# EAGLE board sensor board - pdf (EAGLE 7.4.0)
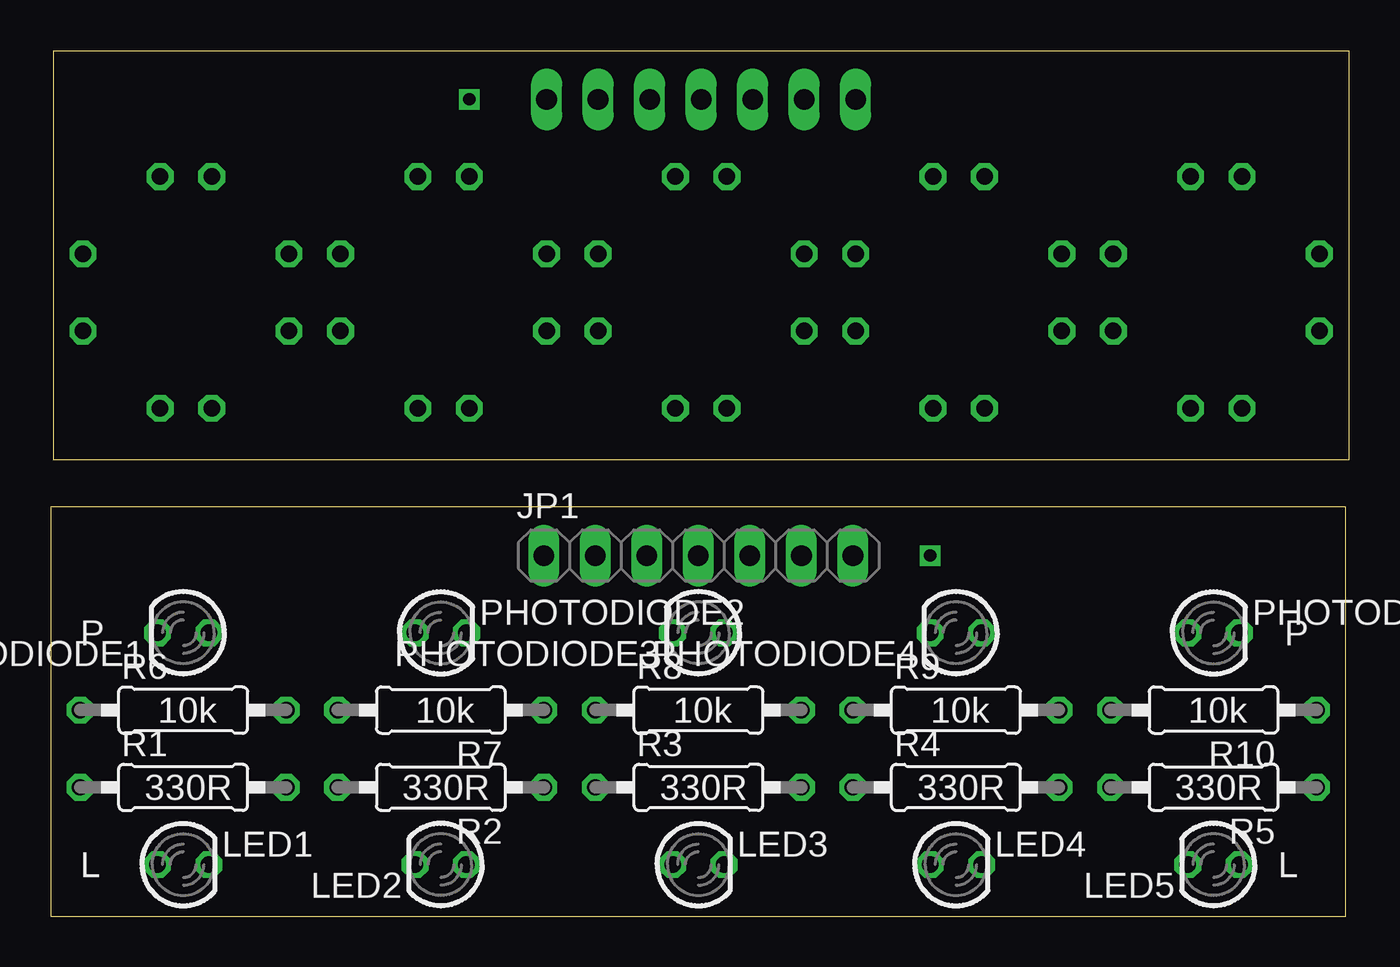
[diagram p0: board, top side]
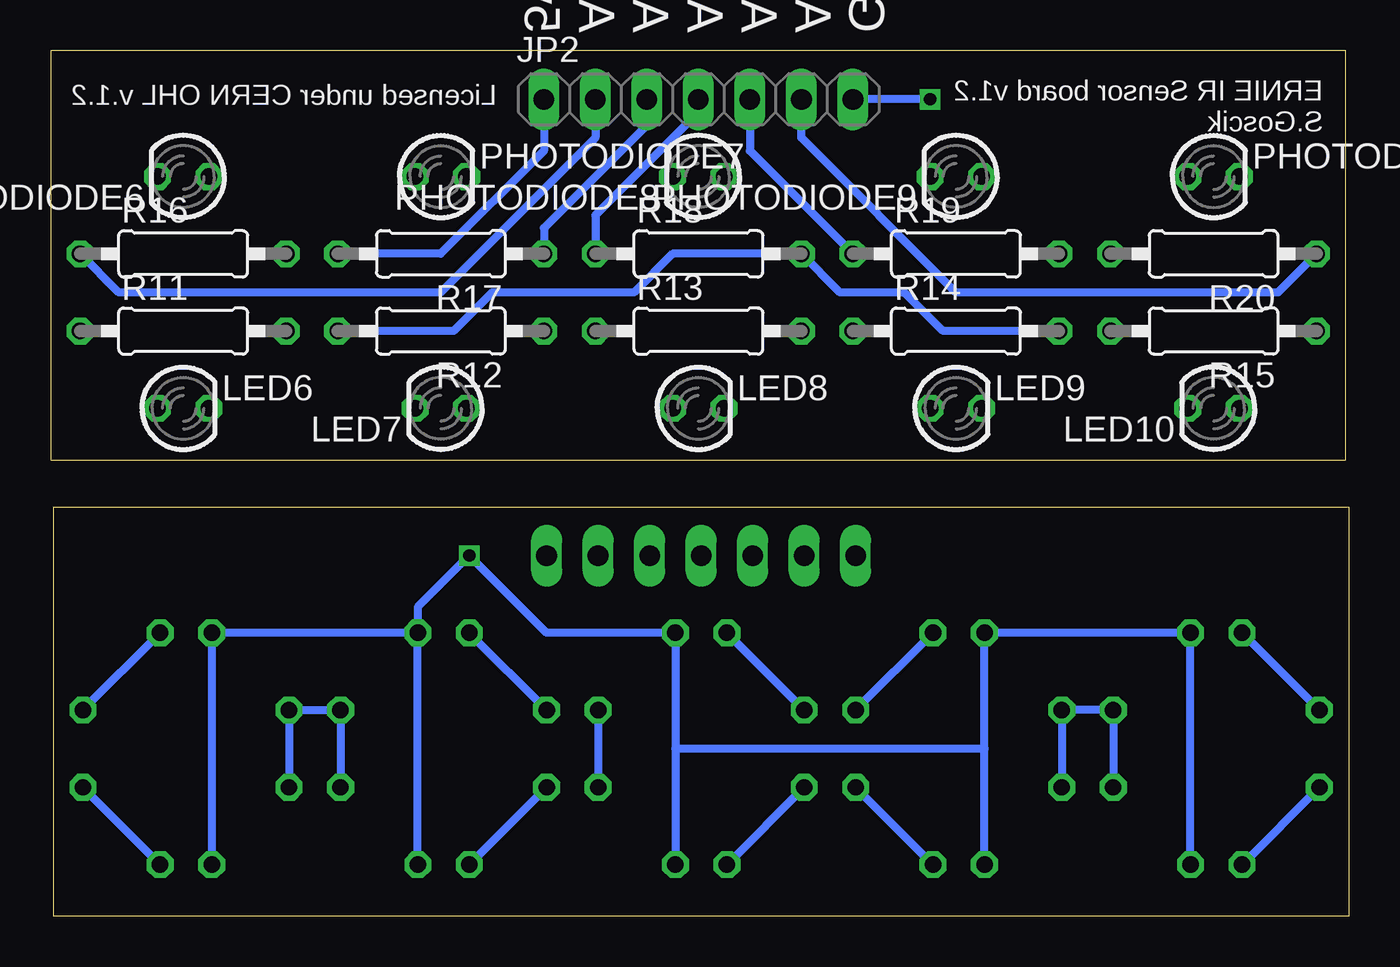
[diagram p1: board, bottom side, seen from below]

Size 64 x 42.67 mm. Coordinates in mm from the lower left corner, seen from the top.
Outline: 0,0 63.85,0 63.85,20.18 0,20.18 0,0
Outline: 64,22.5 0.15,22.5 0.15,42.67 64,42.67 64,22.5
Copper layers (1*16): Top 0.035mm / dielectric 1.5mm / Bottom 0.035mm
Design rules "default": minimum track width 10mil, minimum drill 24mil, track to track 8mil, track to pad 8mil, pad to pad 8mil, via to via 8mil, smd to smd 8mil, copper to edge 40mil, drill to drill 8mil, minimum pad ring 10mil, minimum via ring 8mil, stop-mask expansion 4mil, vias tented up to drill 0mil, thermal gap 10mil

## Footprints (pad centres in the part's own frame; a part is rotated, then mirrored left to right if it is on the bottom)
1X07 = drill 1.016 long: 1 -7.62,0; 2 -5.08,0; 3 -2.54,0; 4 0,0; 5 2.54,0; 6 5.08,0; 7 7.62,0
LED3MM = drill 0.813 octagon: A -1.27,0; K 1.27,0
0207/10 = drill 0.813 octagon: 1 -5.08,0; 2 5.08,0

## Placement (x,y rotation side)
JP1  [1X07]  31.93,17.78 0 top
JP2  [1X07]  32.07,40.28 0 bottom
LED1  [LED3MM]  6.53,2.54 0 top
LED2  [LED3MM]  19.23,2.54 180 top
LED3  [LED3MM]  31.93,2.54 0 top
LED4  [LED3MM]  44.63,2.54 0 top
LED5  [LED3MM]  57.33,2.54 180 top
LED6  [LED3MM]  57.47,25.04 0 bottom
LED7  [LED3MM]  44.77,25.04 180 bottom
LED8  [LED3MM]  32.07,25.04 0 bottom
LED9  [LED3MM]  19.37,25.04 0 bottom
LED10  [LED3MM]  6.67,25.04 180 bottom
PHOTODIODE1  [LED3MM]  6.53,13.97 180 top
PHOTODIODE2  [LED3MM]  19.23,13.97 0 top
PHOTODIODE3  [LED3MM]  31.93,13.97 180 top
PHOTODIODE4  [LED3MM]  44.63,13.97 180 top
PHOTODIODE5  [LED3MM]  57.33,13.97 0 top
PHOTODIODE6  [LED3MM]  57.47,36.47 180 bottom
PHOTODIODE7  [LED3MM]  44.77,36.47 0 bottom
PHOTODIODE8  [LED3MM]  32.07,36.47 180 bottom
PHOTODIODE9  [LED3MM]  19.37,36.47 180 bottom
PHOTODIODE10  [LED3MM]  6.67,36.47 0 bottom
R1  330R  [0207/10]  6.53,6.35 0 top
R2  330R  [0207/10]  19.23,6.35 180 top
R3  330R  [0207/10]  31.93,6.35 0 top
R4  330R  [0207/10]  44.63,6.35 0 top
R5  330R  [0207/10]  57.33,6.35 180 top
R6  10k  [0207/10]  6.53,10.16 0 top
R7  10k  [0207/10]  19.23,10.16 180 top
R8  10k  [0207/10]  31.93,10.16 0 top
R9  10k  [0207/10]  44.63,10.16 0 top
R10  10k  [0207/10]  57.33,10.16 180 top
R11  330R  [0207/10]  57.47,28.85 0 bottom
R12  330R  [0207/10]  44.77,28.85 180 bottom
R13  330R  [0207/10]  32.07,28.85 0 bottom
R14  330R  [0207/10]  19.37,28.85 0 bottom
R15  330R  [0207/10]  6.67,28.85 180 bottom
R16  10k  [0207/10]  57.47,32.66 0 bottom
R17  10k  [0207/10]  44.77,32.66 180 bottom
R18  10k  [0207/10]  32.07,32.66 0 bottom
R19  10k  [0207/10]  19.37,32.66 0 bottom
R20  10k  [0207/10]  6.67,32.66 180 bottom

## Library data of the parts
JP1 JP2 = pinhead
LED1-LED10 PHOTODIODE1-PHOTODIODE10 = led
R1-R20 = rcl

## Nets
N$1: LED1.A R1.1
N$3: LED2.A R2.1
N$5: LED3.A R3.1
N$7: LED4.A R4.1
N$8: PHOTODIODE4.K R9.1
N$9: LED5.A R5.1
N$10: PHOTODIODE5.K R10.1
N$11: R4.2 R5.2 R9.2 R10.2
N$12: LED1.K LED2.K LED3.K LED4.K LED5.K PHOTODIODE1.A PHOTODIODE2.A PHOTODIODE3.A PHOTODIODE4.A PHOTODIODE5.A
N$15: JP2.3 R17.1
N$17: JP2.4 R18.1
N$19: JP2.5 R19.1
N$21: JP2.6 R20.1
N$22: R12.2 R14.2 R18.2
N$24: JP2.2 R16.1
S$1: PHOTODIODE1.K R6.1
S$2: JP2.7
S$3: PHOTODIODE2.K R7.1
S$4: R1.2 R2.2 R6.2 R7.2
S$5: PHOTODIODE3.K R8.1
S$6: R3.2 R8.2
S$7: JP2.1 R17.2

## Tracks (layer width: path | path; a pad name or v marks a point on that pad's centre or on a via)
N$1
  Bottom 0.406: R1.1 LED1.A
N$3
  Bottom 0.406: R2.1 LED2.A
N$5
  Bottom 0.406: R3.1 LED3.A
N$7
  Bottom 0.406: R4.1 LED4.A
N$8
  Bottom 0.406: PHOTODIODE4.K R9.1
N$9
  Bottom 0.406: LED5.A R5.1
N$10
  Bottom 0.406: R10.1 PHOTODIODE5.K
N$11
  Bottom 0.406: R4.2 R9.2 R10.2 R5.2
N$12  (via drill 0.6)
  Bottom 0.406: LED1.K PHOTODIODE1.A PHOTODIODE2.A 17.96,8.26 | PHOTODIODE4.A PHOTODIODE5.A LED5.K | LED4.K PHOTODIODE4.A | 33.2,8.26 PHOTODIODE3.A 39.55,13.97 v43.36,17.78 45.9,15.24 PHOTODIODE4.A | 33.2,8.26 LED3.K | LED2.K 17.96,8.26 | 17.96,8.26 33.2,8.26
N$15
  Bottom 0.406: JP2.3 34.61,39.01 39.69,33.93 R17.1
N$17
  Bottom 0.406: JP2.4 32.07,39.65 37.15,34.56 R18.1
N$19
  Bottom 0.406: JP2.5 29.53,37.74 R19.1
N$21
  Bottom 0.406: R20.1 3.49,30.75 19.37,30.75 26.99,38.38 JP2.6
N$22
  Bottom 0.406: R12.2 44.13,28.85 42.23,30.75 35.24,30.75 33.34,32.66 R18.2 25.08,30.75 21.91,30.75 20,28.85 R14.2
N$24
  Bottom 0.406: R16.1 60.64,30.75 44.77,30.75 37.15,38.38 JP2.2
S$1
  Bottom 0.406: R6.1 PHOTODIODE1.K
S$2  (via drill 0.6)
  Bottom 0.406: v20.64,40.28 JP2.7
S$3
  Bottom 0.406: PHOTODIODE2.K R7.1
S$4
  Bottom 0.406: R2.2 R7.2 R6.2 R1.2
S$5
  Bottom 0.406: R8.1 PHOTODIODE3.K
S$6
  Bottom 0.406: R8.2 R3.2
S$7
  Bottom 0.406: JP2.1 39.69,37.74 44.77,32.66 R17.2

## Text on the board
Document: Copyright S.Goscik 2015. / This documentation describes Open Hardware and is licensed under the CERN OHL v. 1.2. / You may redistribute and modify this documentation under the terms of the CERN OHL v.1.2. / (http://ohwr.org/cernohl). This documentation is distributed WITHOUT ANY EXPRESS OR / IMPLIED WARRANTY, INCLUDING OF MERCHANTABILITY, SATISFACTORY QUALITY AND / FITNESS FOR A PARTICULAR PURPOSE. Please see the CERN OHL v.1.2 for applicable / conditions
bSilk: GND / A4 / A3 / A2 / A1 / A0 / 5v | Licensed under CERN OHL v.1.2 | ERNIE IR Sensor board v1.2 / S.Goscik
tSilk: P | P | 10k | 10k | 10k | 10k | 10k | 330R | 330R | 330R | 330R | 330R | L | L